# EAGLE board hex_schmitt_CMOS (EAGLE 9.5.2)
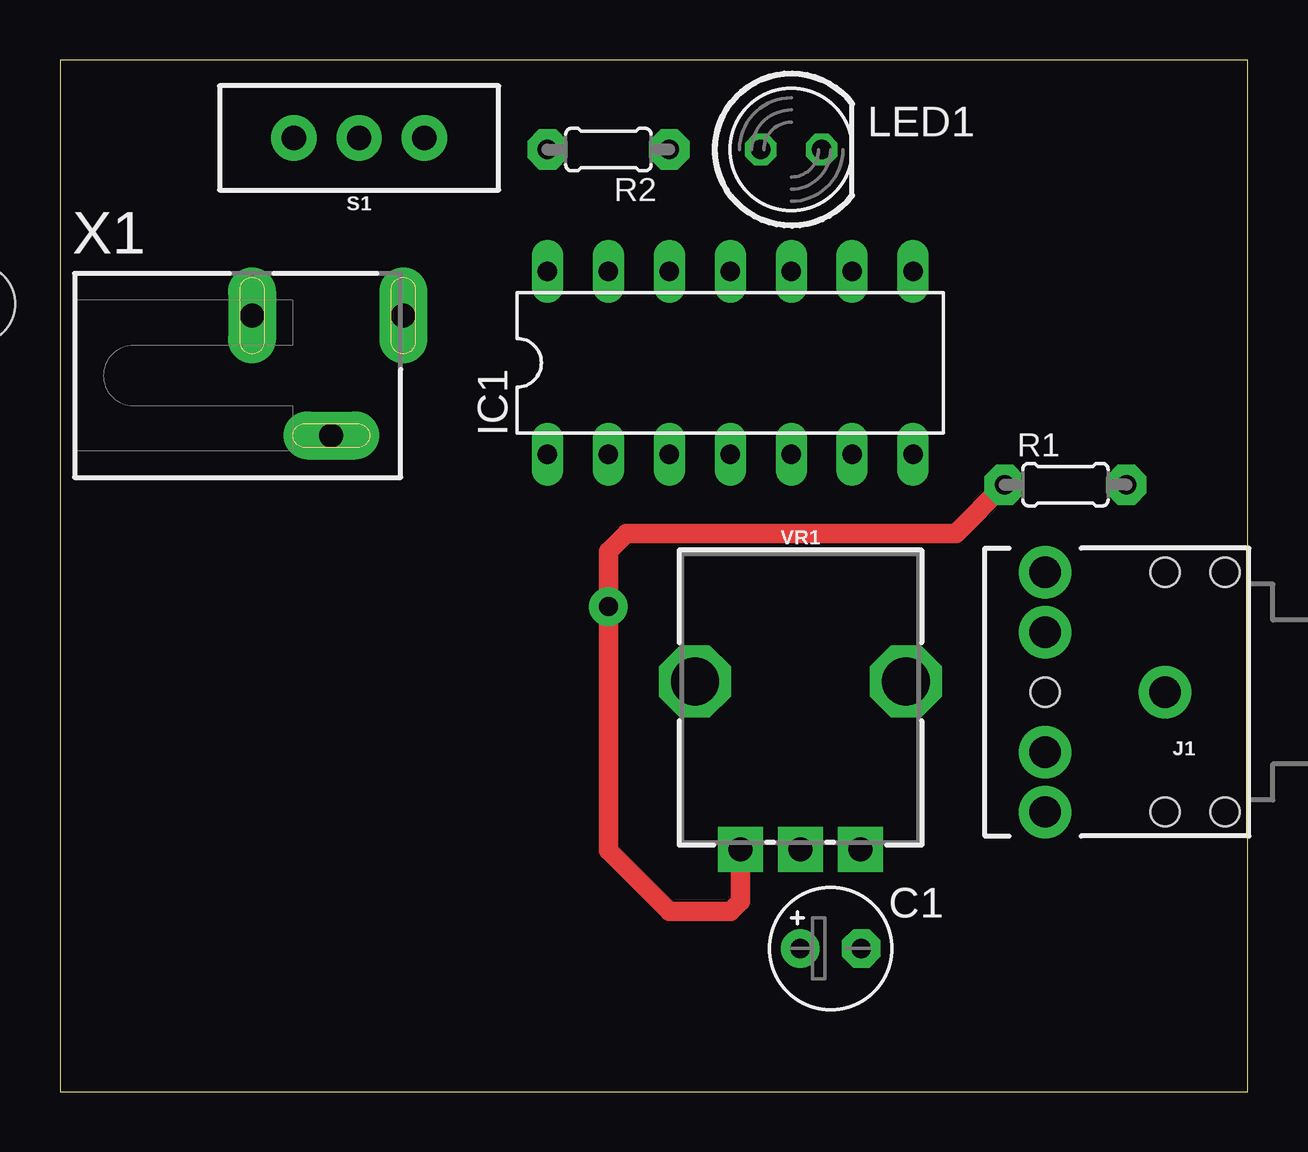
[diagram p0: board, top side]
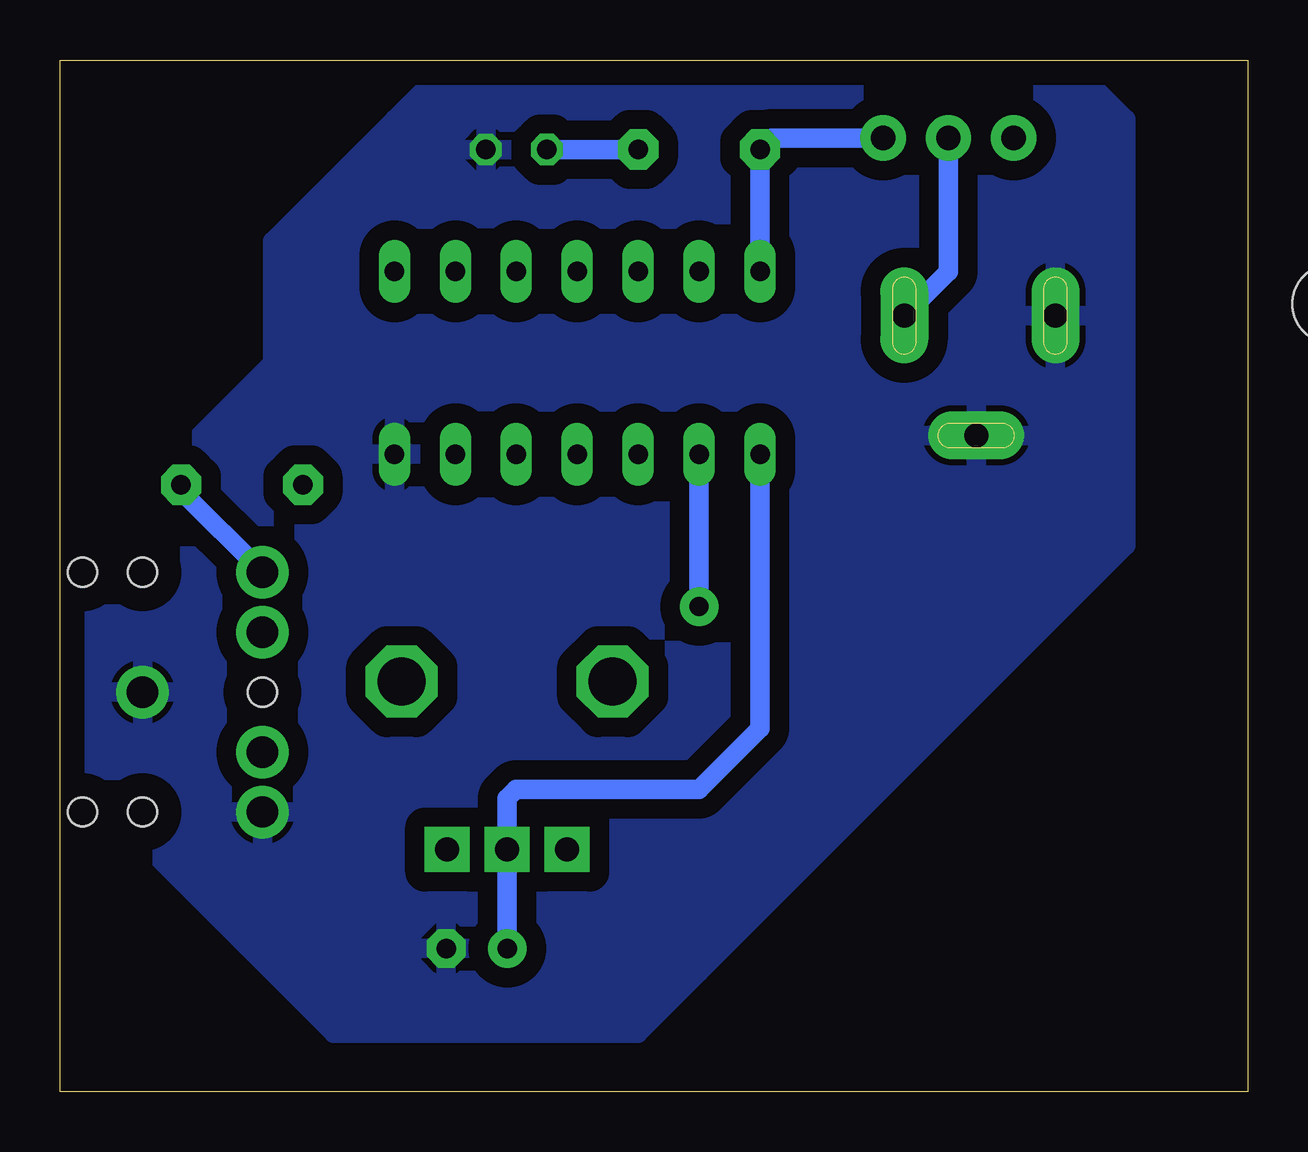
[diagram p1: board, bottom side, seen from below]

Size 49.5 x 43 mm. Coordinates in mm from the lower left corner, seen from the top.
Outline: 0,0 49.5,0 49.5,43 0,43 0,0
Copper layers (1*16): Top 0.035mm / dielectric 1.5mm / Bottom 0.035mm
Design rules "default *": minimum track width 6mil, minimum drill 0.35mm, track to track 6mil, track to pad 6mil, pad to pad 6mil, via to via 6mil, smd to smd 6mil, copper to edge 40mil, drill to drill 6mil, minimum pad ring 10mil, minimum via ring 8mil, stop-mask expansion 4mil, vias tented up to drill 0mil, thermal gap 10mil

## Footprints (pad centres in the part's own frame; a part is rotated, then mirrored left to right if it is on the bottom)
E2,5-5 = drill 0.813 pad 1.6: + -1.27,0 | drill 0.813 pad 1.6 octagon: - 1.27,0
STAND-OFF = hole 3.302: 0,0
DIL14 = drill 0.813 long: 1 -7.62,-3.81; 2 -5.08,-3.81; 3 -2.54,-3.81; 4 0,-3.81; 5 2.54,-3.81; 6 5.08,-3.81; 7 7.62,-3.81; 8 7.62,3.81; 9 5.08,3.81; 10 2.54,3.81; 11 0,3.81; 12 -2.54,3.81; 13 -5.08,3.81; 14 -7.62,3.81
AUDIO-JACK = drill 1.3 pad 2.184: RING 5,5; RSH 5,2.5; SLEEVE 0,0; TIP 5,-5; TSH 5,-2.5 | hole 1.2: 0,5; -2.5,5; -2.5,-5; 0,-5; 5,0
LED5MM = drill 0.813 octagon: A -1.27,0; K 1.27,0
0204/5_66PADS = drill 0.813 pad 1.676 octagon: 1 -2.54,0; 2 2.54,0
SWITCH_SPDT_PTH_11.6X4.0MM_LOCK = drill 1.016 pad 1.88: 1 0,2.718; 2 0,0; 3 0,-2.718
POT-PTH-ALPS = drill 1 pad 1.88 square: P$1 7,-2.5; P$2 7,0; P$3 7,2.5 | drill 2 octagon: P$4 0,-4.4; P$5 0,4.4
SCD-014-A = drill 1 pad 2 long: 1 -2.5,13.8; 2 -2.5,7.5; 3 2.5,10.8

## Placement (x,y rotation side)
C1  10u  [E2,5-5]  32.13,5.97 0 top
H1  STAND-OFF  [STAND-OFF]  -4.7,39.77 0 top  (outside the outline)
H2  STAND-OFF  [STAND-OFF]  -3.53,32.84 0 top  (outside the outline)
H3  STAND-OFF  [STAND-OFF]  -9.88,32.84 0 top  (outside the outline)
H4  STAND-OFF  [STAND-OFF]  -16.23,32.84 0 top  (outside the outline)
IC1  40106N  [DIL14]  27.94,30.38 0 top
J1  AUDIO_JACK_3.5MM_PTH  [AUDIO-JACK]  46.06,16.65 180 top
LED1  Red  [LED5MM]  30.48,39.27 0 top
R1  10k  [0204/5_66PADS]  41.91,25.3 0 top
R2  330  [0204/5_66PADS]  22.86,39.27 180 top
S1  switch  [SWITCH_SPDT_PTH_11.6X4.0MM_LOCK]  12.47,39.75 90 top
VR1  10k  [POT-PTH-ALPS]  30.86,17.09 270 top
X1  DC  [SCD-014-A]  0.51,29.84 270 top

## Library data of the parts
C1 R1 R2 = cta_library_EAGLE
H1-H4 = SparkFun-Hardware
IC1 = 40xx
J1 = SparkFun-Connectors; PROD_ID: CONN-08774; SF_ID: PRT-08032
LED1 = led
S1 = SparkFun-Switches; PROD_ID: SWCH-08261; SF_SKU: COM-00102
VR1 = SparkFun-Resistors; PROD_ID: RES-09177; SF_SKU: COM-09288
X1 = con-shiua-chyuan; OC_FARNELL: unknown; OC_NEWARK: unknown

## Nets
GND: C1.- IC1.7 J1.RING J1.SLEEVE LED1.K X1.2 X1.3
N$1: C1.+ IC1.1 VR1.P$2
N$2: IC1.2 R1.1 VR1.P$1
N$3: S1.2 X1.1
N$5: LED1.A R2.1
OUT: J1.TIP R1.2
VCC: IC1.14 R2.2 S1.3

## Tracks (layer width: path | path; a pad name or v marks a point on that pad's centre or on a via)
GND
  pour Bottom (isolate 0.813): 5.08,35.46 5.08,40.54 7.62,43.08 33.02,43.08 35.56,40.54 40.64,35.46 40.64,30.38 48.26,22.76 48.26,12.6 38.1,2.44 25.4,2.44 22.86,4.98 5.08,22.76
N$1
  Bottom 0.813: IC1.1 20.32,15.14 22.86,12.6 30.48,12.6 30.86,12.22 VR1.P$2 C1.+
N$2  (via drill 0.8 pad 1.3)
  Top 0.813: VR1.P$1 28.36,7.94 27.94,7.52 25.4,7.52 22.86,10.06 v22.86,20.22 22.86,22.5 23.62,23.26 37.34,23.26 R1.1
  Bottom 0.813: IC1.2 v22.86,20.22
N$3
  Bottom 0.813: X1.1 12.47,34.18 S1.2
N$5
  Bottom 0.813: R2.1 LED1.A
OUT
  Bottom 0.813: J1.TIP 44.45,25.04 R1.2
VCC
  Bottom 0.813: S1.3 19.84,39.75 R2.2 IC1.14